# Altium PCB GeneralPurposePowerSupply.PcbDoc
Units mm, origin at the board's own origin, x right, y up, seen from the top; angles counter-clockwise.
Board outline 100 x 60 mm, 2 copper layers (Top Layer, Bottom Layer); 128 components, 67 nets, 380 pads, 795 vias.
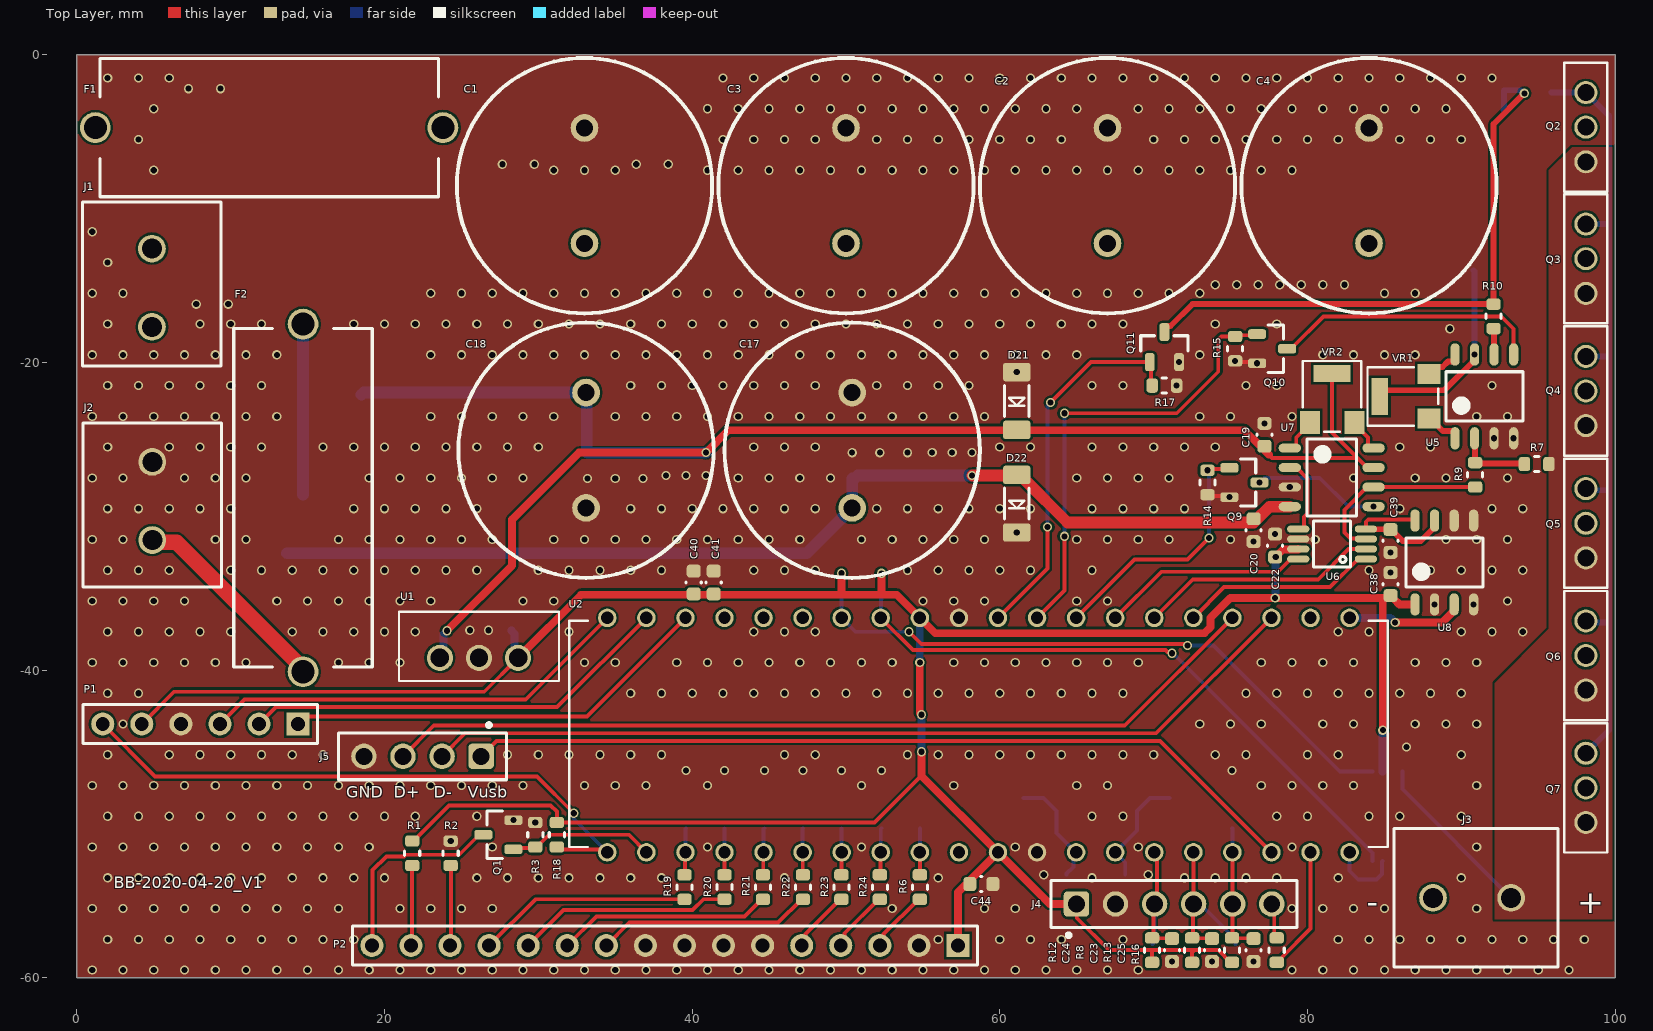
[diagram p0: Top Layer view]
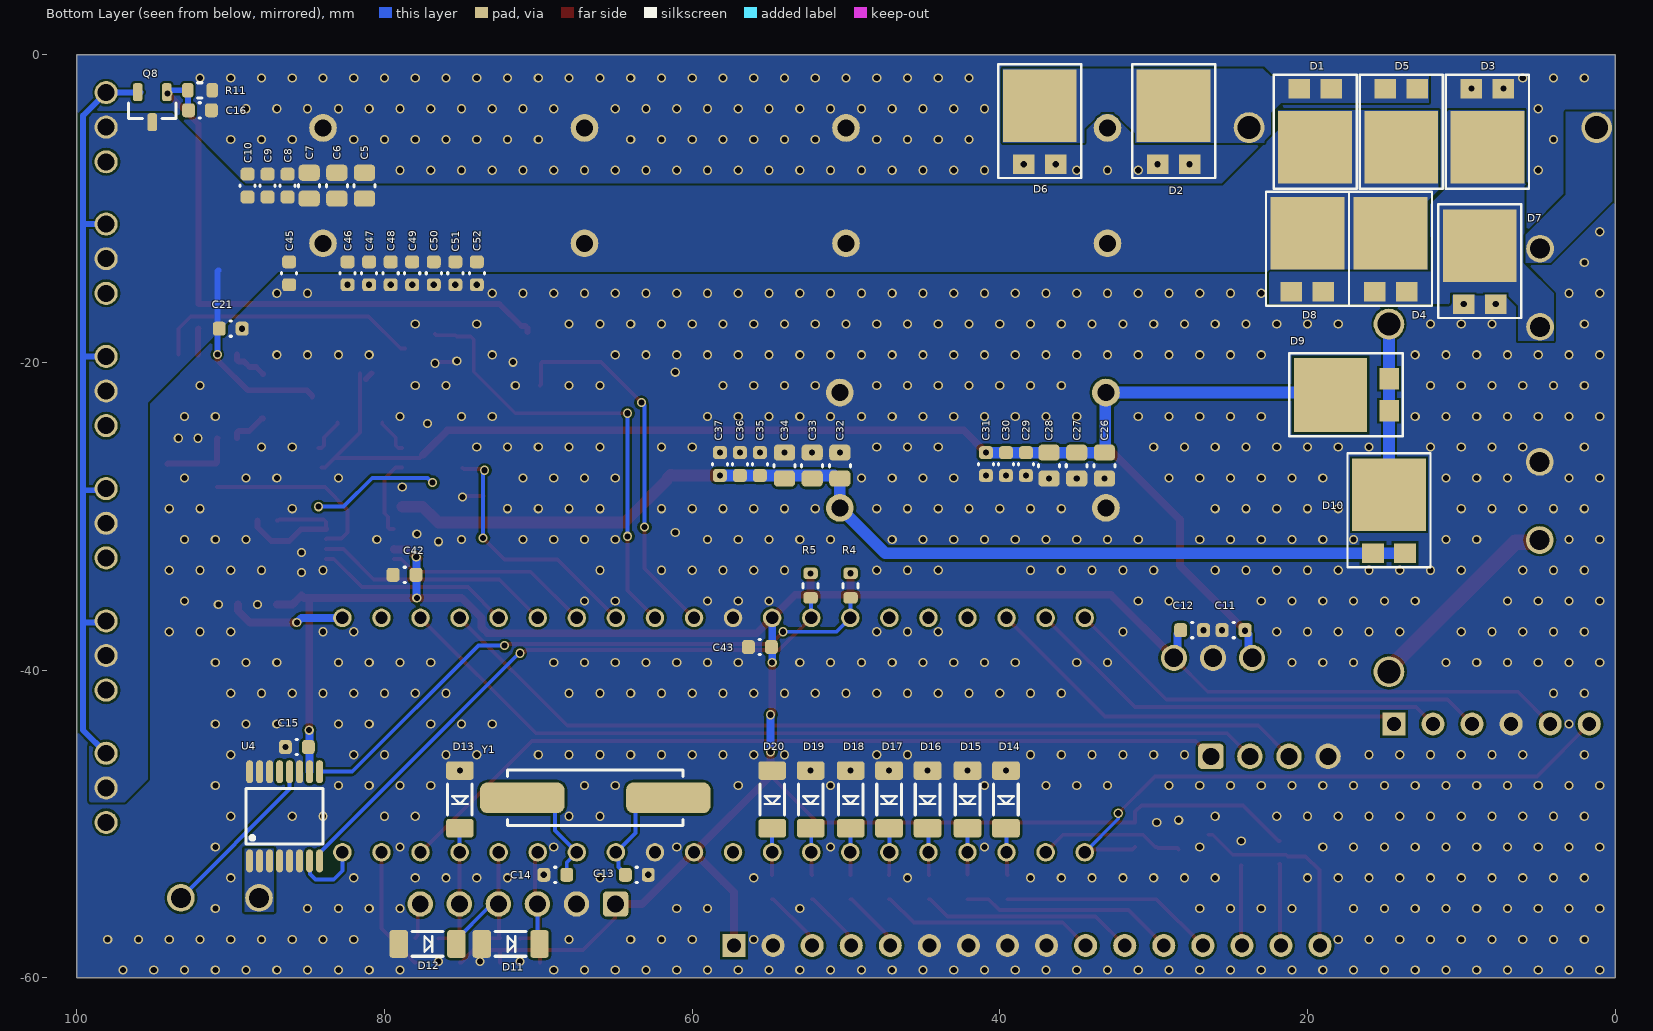
[diagram p1: Bottom Layer view, seen from below]
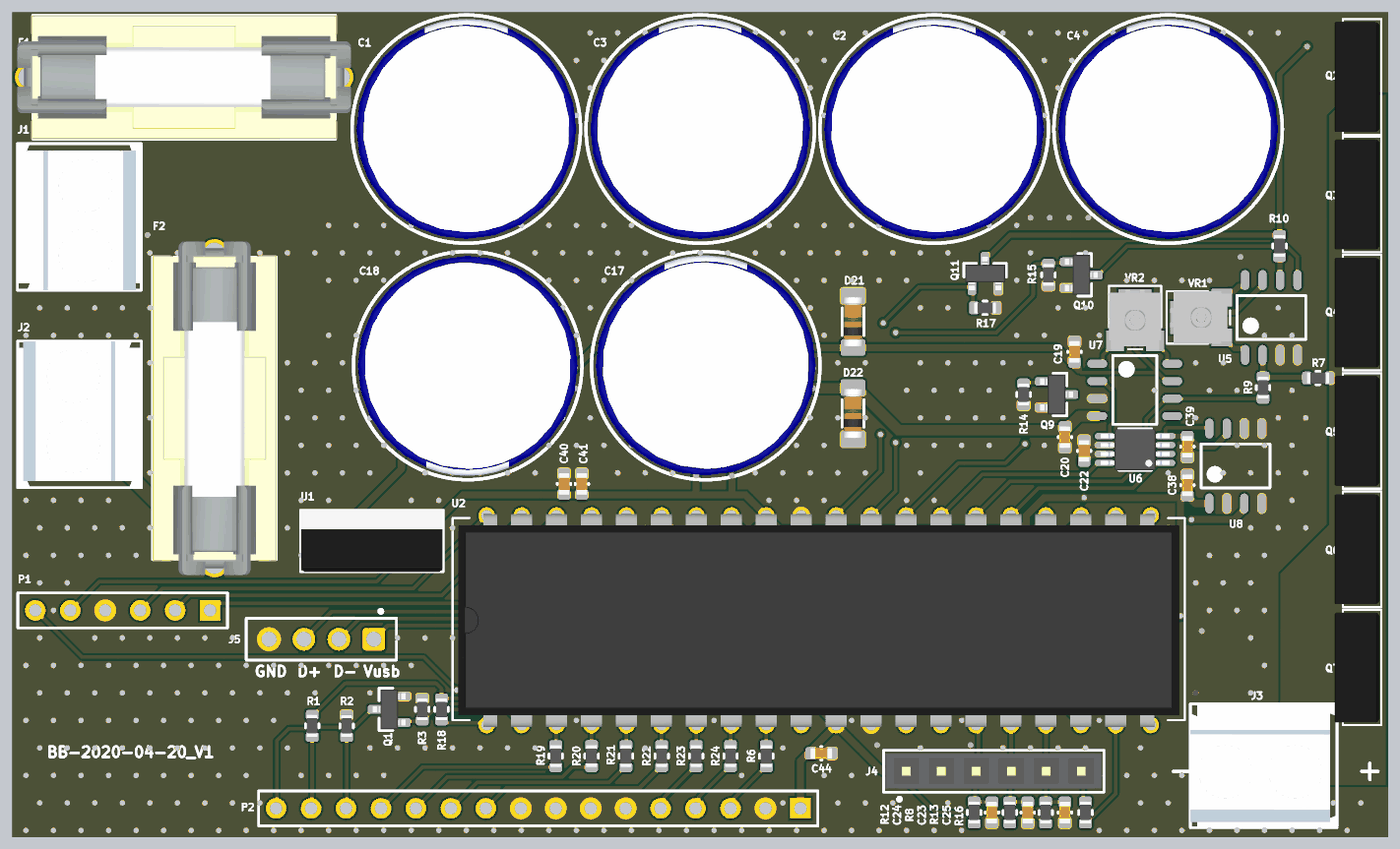
[diagram p2: 3D render of the assembled board from above, using the file's embedded part models]
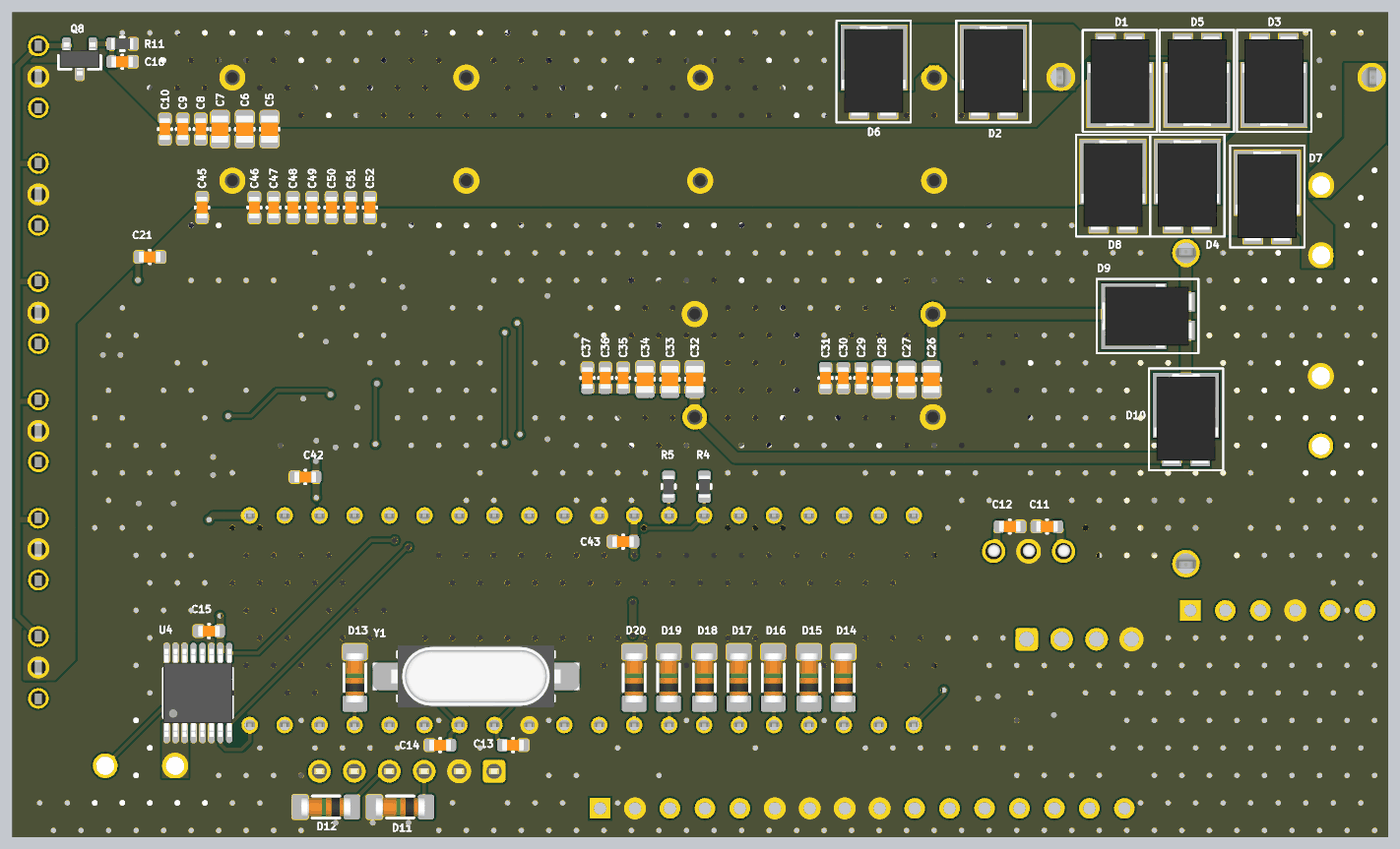
[diagram p3: 3D render of the assembled board from below, using the file's embedded part models]

## Layer stack, top to bottom
Top Solder: solder mask 0.0102, Solder Resist, Dk 3.5
Top Layer: signal copper 0.0356
Dielectric 1: dielectric 0.32, FR-4, Dk 4.8
Bottom Layer: signal copper 0.0356
Bottom Solder: solder mask 0.0102, Solder Resist, Dk 3.5

## Board outline
0,-60 0,0 100,0 100,-60

## Design rules (kind name [scope] priority, off if disabled: settings)
Clearance [All] p1: gap=0.15 ignorepadtopadclearanceinfootprint=FALSE except(0: Arc-Hole Track-Hole SMDPad-Hole THPad-Hole Via-Hole Fill-Hole Poly-Hole Region-Hole Text-Hole)
Height [All] p1: minheight=0 maxheight=35 prefheight=12.7
HoleSize [All] p1: absolutevalues=TRUE maxlimit=6.3 minlimit=0.2 maxpercent=80.000 minpercent=20.000
MinimumSolderMaskSliver [All] p1: minsoldermaskwidth=0.15
PlaneConnect [All] p1: planeconnectstyle=Direct reliefexpansion=0.508 reliefentries=4 reliefconductorwidth=0.254 reliefairgap=0.254
PolygonConnect [All] p1: connectstyle=Direct reliefconductorwidth=0.254 reliefentries=4 polygonreliefangle="90 Angle" airgapwidth=0.254
RoutingVias [All] p1: holewidth=0.6 width=0.35 viastyle="Through Hole" minholewidth=0.35 minwidth=0.3 maxholewidth=1.7 maxwidth=1.5
SilkToSilkClearance [All] p1: silktosilkclearance=0.15
SilkToSolderMaskClearance [IsPad] p1: minsilkscreentomaskgap=0.08 clearancetoexposedcopper=TRUE
SolderMaskExpansion [All] p1: expansion=0.045 istentingtop=FALSE
Width [All] p1: maxlimit=1.524 minlimit=0.203 preferedwidth=0.254 minimp=50.000000 maximp=50.000000 favimp=50.000000
24 further rules are at their usual default settings.

## Components (designator, comment, footprint, x,y, rotation, side; value= is the part's Value field where it differs from the comment)
C1 "2200u" C_16x32 33,-8.5 r90 top
C2 "2200u" C_16x32 67,-8.5 r90 top
C3 "2200u" C_16x32 50,-8.5 r90 top
C4 "2200u" C_16x32 84,-8.5 r90 top
C5 "10u" C0805_N 81.3,-8.5 r90 bottom
C6 "10u" C0805_N 83.1,-8.5 r90 bottom
C7 "10u" C0805_N 84.9,-8.5 r90 bottom
C8 "100n" C0603_N 86.3,-8.5 r90 bottom
C9 "100n" C0603_N 87.6,-8.5 r90 bottom
C10 "100n" C0603_N 88.9,-8.5 r90 bottom
C11 "100n" C0603_N 24.8,-37.4 r0 bottom
C12 "100n" C0603_N 27.5,-37.4 r180 bottom
C13 "20p" C0603_N 63.6,-53.3 r180 bottom
C14 "20p" C0603_N 68.9,-53.3 r0 bottom
C15 "100n" C0603_N 85.7,-45 r0 bottom
C16 "DNP" C0603_N 92,-3.6 r180 bottom
C17 "2200u" C_16x32 50.4,-25.7 r90 top
C18 "2200u" C_16x32 33.1,-25.7 r270 top
C19 "100n" C0603_N 77.2,-24.7 r90 top
C20 "100n" C0603_N 76.5,-30.9 r270 top
C21 "100n" C0603_N 90,-17.8 r180 bottom
C22 "100n" C0603_N 77.9,-31.9 r90 top
C23 "100n" C0603_N 73.8,-58.2 r270 top
C24 "100n" C0603_N 71.2,-58.2 r270 top
C25 "100n" C0603_N 76.5,-58.2 r270 top
C26 "10u" C0805_N 33.2,-26.7 r270 bottom
C27 "10u" C0805_N 35,-26.7 r270 bottom
C28 "10u" C0805_N 36.8,-26.7 r270 bottom
C29 "100n" C0603_N 38.3,-26.6 r270 bottom
C30 "100n" C0603_N 39.6,-26.6 r270 bottom
C31 "100n" C0603_N 40.9,-26.6 r270 bottom
C32 "10u" C0805_N 50.4,-26.7 r270 bottom
C33 "10u" C0805_N 52.2,-26.7 r270 bottom
C34 "10u" C0805_N 54,-26.7 r270 bottom
C35 "100n" C0603_N 55.6,-26.6 r270 bottom
C36 "100n" C0603_N 56.9,-26.6 r270 bottom
C37 "100n" C0603_N 58.2,-26.6 r270 bottom
C38 "1u" C0603_N 85.4,-34.4 r90 top
C39 "300p" C0603_N 85.4,-31.6 r270 top
C40 "100n" C0603_N 40.1,-34.3 r90 top
C41 "100n" C0603_N 41.4,-34.3 r90 top
C42 "100n" C0603_N 78.7,-33.8 r0 bottom
C43 "100n" C0603_N 55.6,-38.5 r0 bottom
C44 "100n" C0603_N 58.8,-53.9 r0 top
C45 "100n" C0603_N 86.2,-14.2 r270 bottom
C46 "100n" C0603_N 82.4,-14.2 r270 bottom
C47 "100n" C0603_N 81,-14.2 r270 bottom
C48 "100n" C0603_N 79.6,-14.2 r270 bottom
C49 "100n" C0603_N 78.2,-14.2 r270 bottom
C50 "100n" C0603_N 76.8,-14.2 r270 bottom
C51 "100n" C0603_N 75.4,-14.2 r270 bottom
C52 "100n" C0603_N 74,-14.2 r270 bottom
D1 "SS3P4L" TO-277 19.5,-2.195 r0 bottom
D2 "SS3P4L" TO-277 28.7,-7.105 r180 bottom
D3 "SS3P4L" TO-277 8.3,-2.195 r0 bottom
D4 "SS3P4L" TO-277 14.6,-15.405 r180 bottom
D5 "SS3P4L" TO-277 13.9,-2.195 r0 bottom
D6 "SS3P4L" TO-277 37.4,-7.105 r180 bottom
D7 "SS3P4L" TO-277 8.8,-16.205 r180 bottom
D8 "SS3P4L" TO-277 20,-15.405 r180 bottom
D9 "SS3P4L" TO-277 14.695,-22.1 r90 bottom
D10 "SS3P4L" TO-277 14.7,-32.405 r180 bottom
D11 "ZMM5,1" SOD-80 71.8,-57.8 r0 bottom
D12 "ZMM5,1" SOD-80 77.2,-57.8 r0 bottom
D13 "ZMM5,1" SOD-80 75.1,-48.4 r90 bottom
D14 "ZMM5,1" SOD-80 39.6,-48.4 r90 bottom
D15 "ZMM5,1" SOD-80 42.1,-48.4 r90 bottom
D16 "ZMM5,1" SOD-80 44.7,-48.4 r90 bottom
D17 "ZMM5,1" SOD-80 47.2,-48.4 r90 bottom
D18 "ZMM5,1" SOD-80 49.7,-48.4 r90 bottom
D19 "ZMM5,1" SOD-80 52.3,-48.4 r90 bottom
D20 "ZMM5,1" SOD-80 54.8,-48.4 r90 bottom
D21 "ZMM5,1" SOD-80 61.1,-22.5 r90 top
D22 "ZMM5,1" SOD-80 61.1,-29.175 r90 top
F1 "PTF/15" FUSE_PTF/15 12.497,-4.724 r0 top
F2 "PTF/15" FUSE_PTF/15 14.7,-28.8 r90 top
J1 "" TERM_BLOCK_2x1 4.877,-15.138 r270 top
J2 "" TERM_BLOCK_2x1 4.9,-29 r90 top
J3 "" TERM_BLOCK_2x1 90.7,-54.8 r180 top
J4 "" PINSOCK_6x1_THT 72.6,-55.2 r0 top
J5 "SOCHDR_4X1" PINSOCK_4x1_THT 18.66,-45.6 r180 top
P1 "Programmer" HDR1X6 14.38,-43.5 r180 top
P2 "Header 16" HDR1X16 57.28,-57.9 r180 top
Q1 "MOSFET_N" SOT23_123_N 27.4,-50.7 r90 top
Q2 "BD681" TO-126 98.1,-4.7 r90 top
Q3 "BD681" TO-126 98.1,-13.25 r90 top
Q4 "BD681" TO-126 98.1,-21.85 r90 top
Q5 "BD681" TO-126 98.1,-30.45 r90 top
Q6 "BD681" TO-126 98.1,-39.05 r90 top
Q7 "BD681" TO-126 98.1,-47.65 r90 top
Q8 "BC846B" SOT23_123_N 95.1,-3.4 r0 bottom
Q9 "2N7002" SOT23_123_N 75.9,-27.8 r270 top
Q10 "2N7002" SOT23_123_N 77.7,-19.1 r270 top
Q11 "2N7002" SOT23_123_N 70.7,-19 r0 top
R1 "RES" R0603_N 21.8,-51.9 r270 top
R2 "RES" R0603_N 24.3,-51.905 r90 top
R3 "RES" R0603_N 29.8,-50.7 r270 top
R4 "2k2" R0603_N 49.7,-34.5 r270 bottom
R5 "2k2" R0603_N 52.3,-34.5 r270 bottom
R6 "100" R0603_N 54.8,-54.1 r90 top
R7 "20k" R0603_N 94.9,-26.6 r180 top
R8 "2k2" R0603_N 72.5,-58.2 r90 top
R9 "1k" R0603_N 90.9,-27.3 r90 top
R10 "4k7" R0603_N 92.1,-17 r90 top
R11 "DNP" R0603_N 92,-2.3 r180 bottom
R12 "2k2" R0603_N 69.9,-58.2 r90 top
R13 "2k2" R0603_N 75.1,-58.2 r90 top
R14 "RES" R0603_N 73.5,-27.8 r270 top
R15 "RES" R0603_N 75.3,-19.1 r270 top
R16 "100" R0603_N 78,-58.2 r270 top
R17 "RES" R0603_N 70.7,-21.5 r180 top
R18 "1k" R0603_N 31.2,-50.7 r270 top
R19 "100" R0603_N 39.5,-54.1 r90 top
R20 "100" R0603_N 42.1,-54.095 r90 top
R21 "100" R0603_N 44.6,-54.1 r90 top
R22 "100" R0603_N 47.2,-54.1 r90 top
R23 "100" R0603_N 49.7,-54.1 r90 top
R24 "100" R0603_N 52.2,-54.1 r90 top
U1 "L78xx" TO-220 26.14,-39.2 r0 top
U2 "PIC18F4550" DIP-40 57.34,-51.84 r0 top
U4 "INA260" TSSOP-16 86.5,-49.5 r90 bottom
U5 "LT1218" SOIC-8 91.5,-22.2 r90 top
U6 "DAC8811" VSSOP-8 81.6,-31.8 r180 top
U7 "LT1218" SOIC-8 81.575,-27.465 r0 top
U8 "MCP1501" SOIC-8 88.9,-33 r90 top
VR1 "10k" POT_3364W 86.2,-22.2 r90 top
VR2 "10k" POT_3364W 81.6,-22.2 r0 top
Y1 "8MHz" CRYSTAL_HC49/SMD 66.3,-48.3 r180 bottom

## Footprints (in the part's own frame and the unit in brackets; to place one, negate y for a bottom-side part, rotate by r counter-clockwise, add the part's x,y. Pads: shape width x height; smd on the part's side, far side on the other; paste and mask are expansions set on the pad)
C0603_N [mm] "Capacitor, Chip; 1.60 mm L X 0.80 mm W X 0.87 mm H body"
  rrect50% 0.84x0.91 smd: 1(-0.745,0) 2(0.745,0)
  silkscreen extent -0.05,-0.49 0.05,0.49, body extent -0.8,-0.4 0.8,0.4, height 0.87
C0805_N [mm] "Capacitor, Chip; 2.00 mm L X 1.25 mm W X 1.35 mm H body"
  rrect48% 1.05x1.38 smd: 1(-0.84,0) 2(0.84,0)
  silkscreen extent -0.08,-0.68 0.08,0.68, body extent -1,-0.63 1,0.63, height 1.35
C_16x32 [mm] "Capacitor, Aluminum Electrolytic; 7,5mm pitch"
  round 1.8 hole 1.1: N(3.75,0) P(-3.75,0)
  silkscreen extent -8.3,-8.3 8.3,8.3, body extent -8,-8 8.01,8, height 32.01
CRYSTAL_HC49/SMD [mm] "HC49/SMD"
  rrect48% 5.5x2 smd: 1(-4.75,0) 2(4.75,0)
  silkscreen extent -5.7,-1.8 5.7,1.8, body extent -7.5,-2.25 7.5,2.25, height 5.1
DIP-40 [mm] "DIP-40"
  round 1.2 hole 0.8: 1(-22.86,0) 2(-20.32,0) 3(-17.78,0) 4(-15.24,0) 5(-12.7,0) 6(-10.16,0) 7(-7.62,0) 8(-5.08,0) 9(-2.54,0) 10(0,0) 11(2.54,0) 12(5.08,0) 13(7.62,0) 14(10.16,0) 15(12.7,0) 16(15.24,0) 17(17.78,0) 18(20.32,0) 19(22.86,0) 20(25.4,0) 21(25.4,15.24) 22(22.86,15.24) 23(20.32,15.24) 24(17.78,15.24) 25(15.24,15.24) 26(12.7,15.24) 27(10.16,15.24) 28(7.62,15.24) 29(5.08,15.24) 30(2.54,15.24) 31(0,15.24) 32(-2.54,15.24) 33(-5.08,15.24) 34(-7.62,15.24) 35(-10.16,15.24) 36(-12.7,15.24) 37(-15.24,15.24) 38(-17.78,15.24) 39(-20.32,15.24) 40(-22.86,15.24)
  silkscreen extent -25.33,0.35 27.87,15.05, body extent -24.93,-0.12 27.47,15.37, height 5
FUSE_PTF/15 [mm] "Fuse holder, PTF/15"
  round 2 hole 1.5: 1(-11.3,0) 2(11.3,0)
  silkscreen extent -11,-4.5 11,4.5, body extent -12.13,-4.51 12.12,4.49, height 13.97
HDR1X6 [mm] "Connector; Header; 6 Position"
  rect 1.5x1.5 hole 0.9: 1(0,0)
  round 1.5 hole 0.9: 2(2.54,0) 3(5.08,0) 4(7.62,0) 5(10.16,0) 6(12.7,0)
  silkscreen extent -1.27,-1.27 13.97,1.27
HDR1X16 [mm] "Connector; Header; 16 Position"
  rect 1.5x1.5 hole 0.9: 1(0,0)
  round 1.5 hole 0.9: 2(2.54,0) 3(5.08,0) 4(7.62,0) 5(10.16,0) 6(12.7,0) 7(15.24,0) 8(17.78,0) 9(20.32,0) 10(22.86,0) 11(25.4,0) 12(27.94,0) 13(30.48,0) 14(33.02,0) 15(35.56,0) 16(38.1,0)
  silkscreen extent -1.27,-1.27 39.37,1.27
PINSOCK_4x1_THT [mm] "THT Vertical Pin Header, Pitch 2.54mm, 4 pins"
  rrect30% 1.65x1.65 / inner round 1.65 / far side rrect30% 1.65x1.65 hole 1.1 paste-1.65: 1(-7.62,0)
  round 1.65 hole 1.1 paste-1.65: 2(-5.08,0) 3(-2.54,0) 4(0,0)
  silkscreen extent -9.27,-2.16 1.65,1.52
PINSOCK_6x1_THT [mm] "THT Vertical Pin Header, Pitch 2.54mm, Dual Row, 6 pins"
  rrect30% 1.65x1.65 / inner round 1.65 / far side rrect30% 1.65x1.65 hole 1.1 paste-1.65: 1(-7.62,0)
  round 1.65 hole 1.1 paste-1.65: 2(-5.08,0) 3(-2.54,0) 4(0,0) 5(2.54,0) 6(5.08,0)
  silkscreen extent -9.27,-2.16 6.73,1.52, body extent -9.14,-1.27 6.6,1.27, height 8.5
POT_3364W [mm] "3364W potentiometer"
  rect 1.3x1.5 smd: 1(1.45,-1.7) 3(-1.45,-1.7)
  rect 2.4x1.1 smd: 2(0,1.5)
  silkscreen extent -1.9,-2.3 1.9,2.3, body extent -1.9,-2.43 1.9,2.07, height 1.01
R0603_N [mm] "Resistor, Chip; 1.60 mm L X 0.80 mm W X 0.55 mm H body"
  rrect51% 0.74x0.93 smd: 1(-0.795,0) 2(0.795,0)
  silkscreen extent -0.15,-0.49 0.15,0.49, body extent -0.8,-0.4 0.8,0.4, height 0.55
SOD-80 [mm] "SOD-80"
  rrect30% 1.2x1.8 smd: A(1.875,0) C(-1.875,0)
  silkscreen extent -1,-0.8 1,0.8, body extent -1.8,-0.75 1.8,0.75, height 1.5
SOIC-8 [mm] "SOIC, 8-Leads, Body 4.90x3.90mm, Pitch 1.27mm, IPC Medium Density"
  oval 1.45x0.6 smd: 1(-2.725,1.905) 2(-2.725,0.635) 3(-2.725,-0.635) 4(-2.725,-1.905) 5(2.725,-1.905) 6(2.725,-0.635) 7(2.725,0.635) 8(2.725,1.905)
  silkscreen extent -1.6,-2.5 1.6,2.5, body extent -2,-2.5 2,2.5, height 1.75
SOT23_123_N [mm] "Small Outline Transistor (SOT23), 0.95 mm pitch; 3 pin, 2.90 mm L X 1.30 mm W X 1.10 mm H body"
  rrect51% 0.63x1.17 smd: 1(-0.95,-0.975) 2(0.95,-0.975) 3(0,0.975)
  silkscreen extent -1.54,-0.25 1.54,0.74, body extent -1.45,-1.2 1.45,1.2, height 1.1
TERM_BLOCK_2x1 [mm] "TERMINAL BLOCK, TE CONNECTIVITY 282841-2"
  round 1.8 hole 1.3: 1(2.54,0) 2(-2.54,0)
  silkscreen extent -5.58,-4.5 5.08,4.5, body extent -5.58,-4.5 5.08,4.5, height 15.2
TO-126 [mm] "TO-126"
  round 1.5 hole 1.1: B(2.25,0) C(0,0) E(-2.25,0)
  silkscreen extent -4.2,-1.4 4.2,1.4, body extent -4,-1.25 4,2, height 24.94
TO-220 [mm] "TO-220"
  round 1.7 hole 1.2: 1(-2.54,0) 2(0,0) 3(2.54,0)
  silkscreen extent -5.2,-1.5 5.2,3, body extent -5.15,-1.5 5.15,3, height 15.8
TO-277 [mm] "TO-277"
  rect 1.4x1.27 smd: A(-1.04,0) A(1.04,0)
  rect 4.8x4.72 smd: C(0,3.805)
  silkscreen extent -2.7,-0.9 2.7,6.5, body extent -2.3,-0.41 2.3,6.09, height 1.05
TSSOP-16 [mm] "TSSOP-16"
  oval 1.5x0.45 smd mask+0.025: 1(-2.9,2.275) 2(-2.9,1.625) 3(-2.9,0.975) 4(-2.9,0.325) 5(-2.9,-0.325) 6(-2.9,-0.975) 7(-2.9,-1.625) 8(-2.9,-2.275) 9(2.9,-2.275) 10(2.9,-1.625) 11(2.9,-0.975) 12(2.9,-0.325) 13(2.9,0.325) 14(2.9,0.975) 15(2.9,1.625) 16(2.9,2.275)
  silkscreen extent -1.8,-2.5 1.8,2.5, body extent -3.2,-2.5 3.2,2.5, height 1.1
VSSOP-8 [mm] "VSSOP-8"
  oval 1.45x0.45 smd mask+0.025: 1(-2.2,0.975) 2(-2.2,0.325) 3(-2.2,-0.325) 4(-2.2,-0.975) 5(2.2,-0.975) 6(2.2,-0.325) 7(2.2,0.325) 8(2.2,0.975)
  silkscreen extent -1.2,-1.5 1.2,1.5, body extent -2.5,-1.5 2.5,1.5, height 1.1

## Part data
C1 C2 C3 C4 C17 C18: library part CAP_POL, RevS="$Rev:: 58        $"
C5 C6 C7 C8 C9 C10 C11 C12 C13 C14 C15 C16 C19 C20 C21 C22 C23 C24 C25 C26 C27 C28 C29 C30 C31 C32 C33 C34 C35 C36 C37 C38 C39 C40 C41 C42 C43 C44 C45 C46 C47 C48 C49 C50 C51 C52: library part CAP, RevS="$Rev:: 58        $"
D1 D2 D3 D4 D5 D6 D7 D8 D9 D10: library part DIODE
D11 D12 D13 D14 D15 D16 D17 D18 D19 D20 D21 D22: library part DIODE_ZENER
F1 F2: library part FUSE
J1 J2 J3: library part SOCHDR_2X1, "Socket", ComponentLink1Description=Manufacturer, ComponentLink1URL=http://www.we-online.de, ComponentLink2Description=Datasheet, ComponentLink2URL=http://katalog.we-online.de/em/datasheet/691412320002.pdf
J4: library part SOCHDR_6X1, "Socket", ComponentLink1Description=Manufacturer, ComponentLink1URL=http://www.we-online.de, ComponentLink2Description=Datasheet, ComponentLink2URL=http://katalog.we-online.de/em/datasheet/691412320002.pdf
J5: "Socket", ComponentLink1Description=Manufacturer, ComponentLink1URL=http://www.we-online.de, ComponentLink2Description=Datasheet, ComponentLink2URL=http://katalog.we-online.de/em/datasheet/691412320002.pdf
P1: library part "Header 6", "Header, 6-Pin", LatestRevisionDate=17-Jul-2002, LatestRevisionNote="Re-released for DXP Platform.", Publisher="Altium Limited"
P2: "Header, 16-Pin", LatestRevisionDate=17-Jul-2002, LatestRevisionNote="Re-released for DXP Platform.", Publisher="Altium Limited"
Q2 Q3 Q4 Q5 Q6 Q7 Q8: library part BJT_NPN
Q9 Q10 Q11: library part MOSFET_N
R4 R5 R6 R7 R8 R9 R10 R11 R12 R13 R16 R18 R19 R20 R21 R22 R23 R24: library part RES
U2: library part PIC18F4550_DIP40, "PIC18F4550 40 pin type"
U6: "16 bit, 3-wire SPI DAC"
U8: "SOIC-8 Volatage reference"
VR1 VR2: library part RES_POT_M, "Mono"
Y1: library part XTAL_12

## Via types
v1: diameter 0.6, hole 0.4, Top Layer to Bottom Layer, tented both sides, 795 vias

## Nets (pads, with @x,y where several pads share a name; then routed paths per layer and width w, separated by ;. In a path a pad name is that pad's centre, name@x,y a point inside that pad or via, vN(x,y) a via of type N, cw(c..) or ccw(c..) an arc to the next point about the centre after c; other vN are vias at no path point)
5V: C12.1 C15.1 C22.1 C38.1 C40.1 C41.1 C42.1 C43.1 C44.1 J4.1 P1.5 P2.1 R1.1 R4.1 R5.1 R8.1 R12.1 R13.1 R18.1 U1.3 U2.11 U2.32 U4.10 U6.7 U8.1 | length 190.5
  Top Layer w0.254: P1.5 6.32,-41.4 26.48,-41.4 U1.3 ; R1.1 21.895,-51.105 24.2,-48.8 30.8,-48.8 31.2,-49.2 R18.1 51.855,-49.905 54.9,-46.86 ; J4.1 65,-55.22 65,-56.1 67.1,-58.2 69.874,-58.2 ; R12.1 69.9,-58.226 69.874,-58.2 ; R8.1 72.5,-58.349 72.649,-58.2 ; R13.1 75.005,-58.995 74.21,-58.2 72.649,-58.2 ; 69.874,-58.2 72.649,-58.2
  Top Layer w0.508: U1.3 32.78,-35.1 40.1,-35.1 41.4,-35.1 49.7,-35.1 ; v1(49.7,-33.7) 49.7,-35.1 ; v1(52.3,-33.705) 52.3,-35.1 ; v1(54.8,-39.5) 54.8,-42.8 v1(54.9,-42.9) ; v1(54.9,-45.3) 54.9,-46.86 U2.11 ; P2.1 57.28,-54.44 57.955,-53.765 U2.11 ; J4.1 63.24,-55.2 U2.11 ; C22.1@77.8,-32.745 C22.1 v1(77.935,-32.645) 78.434,-32.146 79.379,-32.146 U6.7 ; v1(84.9,-43.9) 84.9,-35.3 ; C38.1 85.245,-35.3 84.9,-35.3 ; C38.1@85.601,-35.346 85.98,-35.725 U8.1 ; 49.7,-35.1 52.3,-35.1 ; 52.3,-35.1 53.3,-35.1 U2.32 55.804,-37.604 73.296,-37.604 73.7,-37.2 73.7,-36.6 75,-35.3 v1(77.9,-35.3) 84.9,-35.3
  Bottom Layer w0.254: U1.3 U1.3@28.8,-39.32
  Bottom Layer w0.508: C12.1 28.245,-37.435 28.452,-37.642 28.452,-38.972 U1.3 ; v1(54.8,-39.5) 54.8,-38.5 54.8,-36.8 54.9,-36.7 U2.32 ; v1(54.9,-45.3) v1(54.9,-42.9) ; v1(77.9,-35.3) 77.917,-35.283 77.917,-32.663 v1(77.935,-32.645) ; U4.10 84.875,-43.925 v1(84.9,-43.9)
BTN: C25.1 D13.C J4.5 R13.2 U2.17 | length 8.6
  Top Layer w0.254: U2.17 75.13,-51.85 75.13,-55.19 J4.5 75.12,-55.22 75.12,-57.385 R13.2 75.125,-57.43 76.475,-57.43 C25.1
  Bottom Layer w0.254: D13.C 75.12,-50.295 U2.17
DAC_C\S\: U2.27 U6.8 | length 13.5
  Top Layer w0.254: U2.27 70.5,-33.6 78.089,-33.6 78.914,-32.775 U6.8
DAC_MOSI: U2.26 U6.2 | length 15.6
  Top Layer w0.254: U2.26 72.54,-34.1 80.7,-34.1 82.675,-32.125 U6.2
DAC_SCK: U2.25 U6.1 | length 12.8
  Top Layer w0.254: U2.25 74.58,-34.6 81.475,-34.6 83.3,-32.775 U6.1
ENC1: C24.1 D11.C J4.3 R12.2 U2.15 | length 9.8
  Top Layer w0.254: U2.15 70.221,-52.021 70.221,-52.461 70.222,-52.462 70.222,-55.038 69.98,-55.28 69.98,-57.325 R12.2 69.925,-57.43 71.175,-57.43 C24.1
  Bottom Layer w0.254: D11.C 70.06,-57.665 J4.3
ENC2: C23.1 D12.C J4.4 R8.2 U2.16 | length 10.9
  Top Layer w0.254: U2.16 72.59,-51.85 72.59,-55.19 J4.4 72.55,-55.25 72.55,-57.355 R8.2 72.525,-57.43 73.775,-57.43 C23.1
  Bottom Layer w0.254: J4.4 72.867,-55.467 73.292,-55.467 75.325,-57.5 D12.C
GND: C1.N C2.N C3.N C4.N C5.2 C6.2 C7.2 C8.2 C9.2 C10.2 C11.2 C12.2 C13.2 C14.2 C15.2 C16.2 C17.N C18.N C19.2 C20.2 C21.2 C22.2 C23.2 C24.2 C25.2 C26.2 C27.2 C28.2 C29.2 C30.2 C31.2 C32.1 C33.1 C34.1 C35.1 C36.1 C37.1 C38.2 C39.2 C40.2 C41.2 C42.2 C43.2 C44.2 C45.2 C46.2 C47.2 C48.2 C49.2 C50.2 C51.2 C52.2 D2.A D3.A D6.A D7.A D11.A D12.A D13.A D14.A D15.A D16.A D17.A D18.A D19.A D20.A D21.A D22.C J2.1 J4.2 J5.4 P1.4 P2.2 P2.6 P2.7 P2.8 P2.9 Q1.2 Q9.2 Q10.2 Q11.2 R2.2 R3.1 R11.2 R14.2 R15.2 R17.1 U1.2 U2.12 U2.31 U4.4 U4.5 U4.6 U4.11 U4.14 U4.15 U4.16 U5.3 U5.4 U6.6 U7.3 U8.2 U8.4 U8.5 U8.6 | length 2.9
  Top Layer w0.254: R14.2@73.578,-28.672 74.848,-28.672 v1(74.925,-28.75) ; v1(75.3,-19.895) 75.378,-19.973 76.648,-19.973 v1(76.725,-20.05)
  other v1: 1,-59.5 3,-59.5 5,-59.5 7,-59.5 9,-59.5 11,-59.5 13,-59.5 15,-59.5 17,-59.5 19,-59.5 21,-59.5 23,-59.5 25,-59.5 27,-59.5 29,-59.5 31,-59.5 33,-59.5 35,-59.5 37,-59.5 39,-59.5 41,-59.5 43,-59.5 45,-59.5 47,-59.5 49,-59.5 51,-59.5 53,-59.5 55,-59.5 57,-59.5 59,-59.5 61,-59.5 63,-59.5 65,-59.5 67,-59.5 69,-59.5 79,-59.5 81,-59.5 83,-59.5 85,-59.5 87,-59.5 89,-59.5 91,-59.5 93,-59.5 95,-59.5 97,-59.5 71.2,-58.945 73.8,-58.945 76.5,-58.945 2,-57.5 4,-57.5 6,-57.5 8,-57.5 10,-57.5 12,-57.5 14,-57.5 16,-57.5 18,-57.5 56,-57.5 60,-57.5 62,-57.5 64,-57.5 68,-57.5 82,-57.5 84,-57.5 86,-57.5 88,-57.5 90,-57.5 92,-57.5 94,-57.5 96,-57.5 98,-57.5 1,-55.5 3,-55.5 5,-55.5 7,-55.5 9,-55.5 11,-55.5 13,-55.5 15,-55.5 17,-55.5 21,-55.5 23,-55.5 25,-55.5 27,-55.5 53,-55.5 59,-55.5 61,-55.5 79,-55.5 81,-55.5 83,-55.5 85,-55.5 91,-55.5 2,-53.5 4,-53.5 6,-53.5 8,-53.5 10,-53.5 12,-53.5 14,-53.5 16,-53.5 18,-53.5 20,-53.5 26,-53.5 28,-53.5 30,-53.5 32,-53.5 34,-53.5 36,-53.5 38,-53.5 46,-53.5 56,-53.5 66,-53.5 72,-53.5 74,-53.5 76,-53.5 78,-53.5 82,-53.5 90,-53.5 62.855,-53.3 69.645,-53.3 1,-51.5 3,-51.5 5,-51.5 7,-51.5 9,-51.5 11,-51.5 13,-51.5 15,-51.5 17,-51.5 19,-51.5 27,-51.5 41,-51.5 51,-51.5 61,-51.5 69,-51.5 79,-51.5 91,-51.5 24.3,-51.11 29.8,-49.905 28.375,-49.75 2,-49.5 4,-49.5 6,-49.5 8,-49.5 10,-49.5 12,-49.5 14,-49.5 16,-49.5 18,-49.5 20,-49.5 22,-49.5 26,-49.5 66,-49.5 68,-49.5 78,-49.5 80,-49.5 84,-49.5 86,-49.5 90,-49.5 1,-47.5 3,-47.5 5,-47.5 7,-47.5 9,-47.5 11,-47.5 13,-47.5 15,-47.5 17,-47.5 19,-47.5 21,-47.5 23,-47.5 25,-47.5 27,-47.5 29,-47.5 33,-47.5 35,-47.5 37,-47.5 41,-47.5 51,-47.5 57,-47.5 65,-47.5 67,-47.5 77,-47.5 79,-47.5 81,-47.5 83,-47.5 91,-47.5 39.6,-46.525 42.1,-46.525 44.7,-46.525 47.2,-46.525 49.7,-46.525 52.3,-46.525 75.1,-46.525 2,-45.5 6,-45.5 8,-45.5 10,-45.5 12,-45.5 14,-45.5 16,-45.5 28,-45.5 30,-45.5 32,-45.5 34,-45.5 36,-45.5 38,-45.5 46,-45.5 48,-45.5 54,-45.5 56,-45.5 58,-45.5 60,-45.5 62,-45.5 64,-45.5 66,-45.5 68,-45.5 70,-45.5 74,-45.5 76,-45.5 80,-45.5 82,-45.5 90,-45.5 86.445,-45 3,-43.5 73,-43.5 75,-43.5 77,-43.5 81,-43.5 83,-43.5 87,-43.5 89,-43.5 91,-43.5 2,-41.5 4,-41.5 36,-41.5 38,-41.5 40,-41.5 42,-41.5 44,-41.5 46,-41.5 48,-41.5 50,-41.5 52,-41.5 54,-41.5 56,-41.5 58,-41.5 60,-41.5 62,-41.5 64,-41.5 66,-41.5 68,-41.5 76,-41.5 78,-41.5 80,-41.5 82,-41.5 84,-41.5 86,-41.5 88,-41.5 90,-41.5 1,-39.5 3,-39.5 5,-39.5 7,-39.5 9,-39.5 11,-39.5 17,-39.5 19,-39.5 21,-39.5 33,-39.5 35,-39.5 39,-39.5 41,-39.5 43,-39.5 45,-39.5 47,-39.5 49,-39.5 51,-39.5 53,-39.5 57,-39.5 59,-39.5 61,-39.5 63,-39.5 65,-39.5 67,-39.5 69,-39.5 77,-39.5 79,-39.5 81,-39.5 83,-39.5 87,-39.5 89,-39.5 91,-39.5 2,-37.5 4,-37.5 6,-37.5 8,-37.5 10,-37.5 14,-37.5 16,-37.5 18,-37.5 20,-37.5 22,-37.5 32,-37.5 44,-37.5 46,-37.5 48,-37.5 82,-37.5 84,-37.5 90,-37.5 92,-37.5 94,-37.5 25.545,-37.4 26.755,-37.4 88.265,-35.725 90.805,-35.725 1,-35.5 3,-35.5 5,-35.5 7,-35.5 13,-35.5 15,-35.5 17,-35.5 19,-35.5 21,-35.5 23,-35.5 29,-35.5 31,-35.5 55,-35.5 57,-35.5 59,-35.5 65,-35.5 67,-35.5 93,-35.5 85.4,-33.655 2,-33.5 4,-33.5 6,-33.5 10,-33.5 12,-33.5 14,-33.5 16,-33.5 18,-33.5 20,-33.5 22,-33.5 24,-33.5 26,-33.5 30,-33.5 32,-33.5 34,-33.5 36,-33.5 38,-33.5 44,-33.5 46,-33.5 48,-33.5 54,-33.5 56,-33.5 58,-33.5 60,-33.5 62,-33.5 66,-33.5 84,-33.5 88,-33.5 90,-33.5 92,-33.5 94,-33.5 85.4,-32.345 76.5,-31.645 1,-31.5 3,-31.5 9,-31.5 11,-31.5 17,-31.5 19,-31.5 21,-31.5 23,-31.5 25,-31.5 27,-31.5 31,-31.5 33,-31.5 35,-31.5 37,-31.5 39,-31.5 41,-31.5 43,-31.5 45,-31.5 47,-31.5 51,-31.5 53,-31.5 55,-31.5 57,-31.5 59,-31.5 65,-31.5 67,-31.5 69,-31.5 71,-31.5 75,-31.5 80.5,-31.5 89,-31.5 91,-31.5 93,-31.5 77.9,-31.155 61.1,-31.05 2,-29.5 4,-29.5 6,-29.5 8,-29.5 10,-29.5 18,-29.5 20,-29.5 22,-29.5 24,-29.5 26,-29.5 36,-29.5 38,-29.5 40,-29.5 42,-29.5 44,-29.5 46,-29.5 48,-29.5 52,-29.5 54,-29.5 56,-29.5 58,-29.5 60,-29.5 62,-29.5 66,-29.5 68,-29.5 70,-29.5 72,-29.5 86,-29.5 92,-29.5 94,-29.5 78.85,-28.1 33.2,-27.54 35,-27.54 36.8,-27.54 1,-27.5 3,-27.5 7,-27.5 9,-27.5 11,-27.5 19,-27.5 21,-27.5 23,-27.5 25,-27.5 27,-27.5 29,-27.5 43,-27.5 45,-27.5 47,-27.5 49,-27.5 65,-27.5 67,-27.5 69,-27.5 71,-27.5 83,-27.5 87,-27.5 89,-27.5 93,-27.5 38.3,-27.345 39.6,-27.345 40.9,-27.345 50.4,-25.86 52.2,-25.86 54,-25.86 55.6,-25.855 56.9,-25.855 58.2,-25.855 2,-25.5 6,-25.5 8,-25.5 10,-25.5 12,-25.5 16,-25.5 18,-25.5 20,-25.5 22,-25.5 24,-25.5 26,-25.5 28,-25.5 30,-25.5 44,-25.5 46,-25.5 48,-25.5 60,-25.5 62,-25.5 66,-25.5 68,-25.5 70,-25.5 72,-25.5 74,-25.5 86,-25.5 88,-25.5 92.135,-24.925 93.405,-24.925 77.2,-23.955 1,-23.5 3,-23.5 5,-23.5 7,-23.5 9,-23.5 11,-23.5 13,-23.5 23,-23.5 25,-23.5 27,-23.5 29,-23.5 31,-23.5 35,-23.5 37,-23.5 39,-23.5 41,-23.5 43,-23.5 45,-23.5 47,-23.5 49,-23.5 51,-23.5 53,-23.5 55,-23.5 57,-23.5 59,-23.5 73,-23.5 75,-23.5 79,-23.5 91,-23.5 93,-23.5 2,-21.5 4,-21.5 6,-21.5 8,-21.5 10,-21.5 12,-21.5 36,-21.5 38,-21.5 40,-21.5 42,-21.5 44,-21.5 46,-21.5 48,-21.5 52,-21.5 54,-21.5 56,-21.5 58,-21.5 66,-21.5 68,-21.5 71.495,-21.5 76,-21.5 78,-21.5 92,-21.5 61.1,-20.625 71.65,-19.975 1,-19.5 3,-19.5 5,-19.5 7,-19.5 9,-19.5 11,-19.5 13,-19.5 23,-19.5 25,-19.5 27,-19.5 29,-19.5 31,-19.5 33,-19.5 35,-19.5 37,-19.5 39,-19.5 41,-19.5 43,-19.5 45,-19.5 47,-19.5 49,-19.5 51,-19.5 53,-19.5 55,-19.5 57,-19.5 59,-19.5 61,-19.5 63,-19.5 65,-19.5 73,-19.5 81,-19.5 83,-19.5 85,-19.5 87,-19.5 89.255,-17.8 2,-17.5 8,-17.5 10,-17.5 12,-17.5 18,-17.5 20,-17.5 22,-17.5 24,-17.5 26,-17.5 28,-17.5 30,-17.5 32,-17.5 34,-17.5 36,-17.5 38,-17.5 40,-17.5 42,-17.5 44,-17.5 46,-17.5 48,-17.5 50,-17.5 52,-17.5 54,-17.5 56,-17.5 58,-17.5 60,-17.5 62,-17.5 64,-17.5 66,-17.5 68,-17.5 74,-17.5 78,-17.5 7.76,-16.205 9.84,-16.205 1,-15.5 3,-15.5 23,-15.5 25,-15.5 27,-15.5 29,-15.5 31,-15.5 33,-15.5 35,-15.5 37,-15.5 39,-15.5 41,-15.5 43,-15.5 45,-15.5 47,-15.5 49,-15.5 51,-15.5 53,-15.5 55,-15.5 57,-15.5 59,-15.5 61,-15.5 63,-15.5 65,-15.5 67,-15.5 69,-15.5 71,-15.5 73,-15.5 85,-15.5 87,-15.5 74,-14.945 75.4,-14.945 76.8,-14.945 78.2,-14.945 79.6,-14.945 81,-14.945 82.4,-14.945 2,-13.5 1,-11.5 5,-7.5 31,-7.5 33,-7.5 35,-7.5 41,-7.5 43,-7.5 45,-7.5 47,-7.5 49,-7.5 51,-7.5 53,-7.5 55,-7.5 57,-7.5 59,-7.5 61,-7.5 63,-7.5 65,-7.5 67,-7.5 69,-7.5 71,-7.5 73,-7.5 75,-7.5 77,-7.5 79,-7.5 27.66,-7.105 29.74,-7.105 36.36,-7.105 38.44,-7.105 4,-5.5 42,-5.5 44,-5.5 46,-5.5 48,-5.5 52,-5.5 54,-5.5 56,-5.5 58,-5.5 60,-5.5 62,-5.5 64,-5.5 70,-5.5 72,-5.5 74,-5.5 76,-5.5 78,-5.5 80,-5.5 82,-5.5 86,-5.5 88,-5.5 90,-5.5 5,-3.5 41,-3.5 43,-3.5 45,-3.5 47,-3.5 49,-3.5 51,-3.5 53,-3.5 55,-3.5 57,-3.5 59,-3.5 61,-3.5 63,-3.5 65,-3.5 69,-3.5 71,-3.5 73,-3.5 75,-3.5 77,-3.5 79,-3.5 81,-3.5 83,-3.5 85,-3.5 87,-3.5 89,-3.5 7.26,-2.195 9.34,-2.195 2,-1.5 4,-1.5 6,-1.5 42,-1.5 44,-1.5 46,-1.5 48,-1.5 50,-1.5 52,-1.5 54,-1.5 56,-1.5 58,-1.5 60,-1.5 62,-1.5 64,-1.5 66,-1.5 68,-1.5 70,-1.5 72,-1.5 74,-1.5 76,-1.5 78,-1.5 80,-1.5 82,-1.5 84,-1.5 86,-1.5 88,-1.5 90,-1.5 92,-1.5
INA260_ALERT: U2.20 U4.7 | length 4.5
  Bottom Layer w0.254: U2.20 82.74,-53.04 83.3,-53.6 84.5,-53.6 84.837,-53.263 84.837,-52.438 U4.7
INA260_SCL: R4.2 U2.34 U4.9 | length 39.9
  Top Layer w0.254: v1(54.096,-37.5) 54.892,-38.296 72.096,-38.296 v1(72.2,-38.4)
  Bottom Layer w0.254: R4.2@49.7,-35.395 49.71,-35.405 49.71,-36.59 U2.34 50.62,-37.5 v1(54.096,-37.5) ; v1(72.2,-38.4) 73.9,-38.4 82.1,-46.6 U4.9
INA260_SDA: R5.2 U2.33 U4.8 | length 40
  Top Layer w0.254: U2.33 54.36,-38.7 70.778,-38.7 70.912,-38.834 71.134,-38.834 v1(71.2,-38.9)
  Bottom Layer w0.254: U2.33 52.28,-36.58 52.28,-35.415 R5.2@52.3,-35.395 ; v1(71.2,-38.9) 71.25,-38.9 79.75,-47.4 84.225,-51.875 U4.8
LCD_BACK: Q1.1 R3.2 U2.2 | length 9.5
  Top Layer w0.254: Q1.1 28.453,-51.573 29.722,-51.573 R3.2 29.895,-51.495 30.69,-50.7 35.88,-50.7 U2.2
LCD_D4: P2.10 R22.1 | length 14
  Top Layer w0.254: P2.10 35.912,-56.408 45.592,-56.408 47.105,-54.895 R22.1
LCD_D5: P2.11 R21.1 | length 14
  Top Layer w0.254: P2.11 33.776,-56.004 43.396,-56.004 44.505,-54.895 R21.1
LCD_D6: P2.12 R20.1 | length 14
  Top Layer w0.254: P2.12 31.64,-55.6 40.028,-55.6 40.738,-54.89 R20.1
LCD_D7: P2.13 R19.1 | length 13.9
  Top Layer w0.254: P2.13 29.805,-54.895 R19.1
LCD_E: P2.5 R23.1 | length 4.1
  Top Layer w0.254: P2.5 47.358,-57.662 47.358,-57.142 49.605,-54.895 R23.1
LCD_RS: P2.3 R6.1 | length 4.1
  Top Layer w0.254: P2.3 52.438,-57.662 52.438,-57.162 54.705,-54.895 R6.1
LCD_RW: P2.4 R24.1 | length 4.1
  Top Layer w0.254: P2.4 49.898,-57.662 49.898,-57.102 52.105,-54.895 R24.1
LED: J4.6 R16.1 | length 2.3
  Top Layer w0.254: J4.6 77.84,-55.36 77.84,-57.245 R16.1
MCLR: P1.6 R18.2 U2.1 | length 39.9
  Top Layer w0.254: P1.6 5.08,-46.9 29.9,-46.9 v1(32.3,-49.3) ; R18.2 31.373,-51.667 34.307,-51.667 U2.1
  Bottom Layer w0.254: v1(32.3,-49.3) 32.3,-49.66 U2.1
NetC16_1: C16.1 Q8.1 Q11.3 R10.2 R11.1 | length 39.6
  Top Layer w0.381: Q11.3 70.7,-17.755 70.825,-17.631 71.095,-17.631 72.52,-16.205 R10.2 92.1,-4.5 v1(94.1,-2.5)
  Bottom Layer w0.381: C16.1 92.77,-3.575 92.77,-2.325 R11.1 93.9,-2.3 v1(94.1,-2.5)
NetC39_1: C39.1 U6.4 U8.7 U8.8 | length 9.3
  Top Layer w0.254: U6.4 83.8,-30.349 83.949,-30.2 86.835,-30.2 86.91,-30.275 U8.8
  Top Layer w0.381: U6.4 83.813,-30.838 85.383,-30.838 C39.1 85.446,-30.855 86.191,-31.6 87.365,-31.6 88.265,-30.7 U8.7
NetD1_A: D1.A D2.C D5.A D6.C F1.2
NetD3_C: D3.C D4.A D7.C D8.A J1.1
NetD9_A: D9.A D10.C F2.2 | length 11.3
  Bottom Layer w0.762: D10.C 14.7,-23.14 14.7,-21.06 F2.2@14.7,-17.3
NetD14_C: D14.C R19.2 U2.3 | length 3.1
  Top Layer w0.254: R19.2 39.53,-53.275 39.53,-51.87 U2.3
  Bottom Layer w0.254: U2.3 39.56,-50.315 D14.C
NetD15_C: D15.C R20.2 U2.4 | length 3
  Top Layer w0.254: R20.2 U2.4
  Bottom Layer w0.254: U2.4 D15.C
NetD16_C: D16.C R21.2 U2.5 | length 3.1
  Top Layer w0.254: R21.2 44.62,-53.285 44.62,-51.86 U2.5
  Bottom Layer w0.254: U2.5 44.64,-50.335 D16.C
NetD17_C: D17.C R22.2 U2.6 | length 3
  Top Layer w0.254: U2.6 47.19,-51.85 47.19,-53.295 R22.2
  Bottom Layer w0.254: U2.6 47.18,-50.295 D17.C
NetD18_C: D18.C R23.2 U2.7 | length 3
  Top Layer w0.254: R23.2 49.71,-53.295 49.71,-51.85 U2.7
  Bottom Layer w0.254: D18.C 49.72,-50.295 U2.7
NetD19_C: D19.C R24.2 U2.8 | length 3.1
  Top Layer w0.254: R24.2 52.23,-53.275 52.23,-51.87 U2.8
  Bottom Layer w0.254: U2.8 52.26,-50.315 D19.C
NetD20_C: D20.C R6.2 U2.9 | length 3
  Top Layer w0.254: R6.2 U2.9
  Bottom Layer w0.254: U2.9 D20.C
NetF1_1: F1.1 J1.2
NetF2_1: F2.1 J2.2 | length 13.3
  Top Layer w1.016: J2.2 5.05,-31.69 6.49,-31.69 F2.1@14.7,-39.9
NetP2_14: P2.14 R2.1 | length 5.2
  Top Layer w0.254: P2.14 24.31,-57.85 24.31,-52.71 R2.1
NetP2_15: P2.15 R1.2 | length 5.3
  Top Layer w0.254: P2.15 21.793,-57.827 21.793,-52.612 R1.2@21.805,-52.6
NetP2_16: P2.16 Q1.3 | length 13.1
  Top Layer w0.254: P2.16 19.22,-57.86 19.22,-53 20.12,-52.1 21.279,-52.1 21.379,-52 24.855,-52 26.155,-50.7 Q1.3
NetQ2_B: Q2.B Q3.B Q4.B Q5.B Q6.B Q7.B Q8.2 | length 52.5
  Bottom Layer w0.381: Q8.2@95.85,-2.425 95.863,-2.438 98.088,-2.438 Q2.B 99.6,-3.95 99.6,-11 ; Q7.B 99.6,-43.9 99.6,-36.9 ; Q6.B 98.2,-36.9 99.6,-36.9 ; Q5.B 98.2,-28.3 99.6,-28.3 ; Q4.B 99.6,-19.6 ; Q3.B 99.6,-11 ; 99.6,-36.9 99.6,-28.3 ; 99.6,-28.3 99.6,-19.6 ; 99.6,-19.6 99.6,-11
NetQ9_D: Q9.3 U7.5 | length 8.3
  Bottom Layer w0.254: v1(76.875,-27.8) 76.897,-27.8 77.197,-27.5 80.8,-27.5 82.67,-29.37 v1(84.3,-29.37)
NetQ10_D: Q10.3 U5.5 | length 17.6
  Top Layer w0.254: Q10.3 78.945,-19.1 81.045,-17 92.6,-17 93.405,-17.805 U5.5
NetR7_2: R7.2 R9.2 U5.2 | length 4.8
  Top Layer w0.381: U5.2 90.883,-24.943 90.883,-26.487 R9.2 90.948,-26.552 94.058,-26.552 R7.2
NetR10_1: R10.1 U5.6 | length 1.7
  Top Layer w0.381: R10.1 92.117,-17.812 92.117,-19.457 U5.6
NetR16_2: R16.2 U2.19 | length 8.1
  Top Layer w0.254: R16.2 78.062,-58.995 78.3,-58.757 78.3,-58.695 80.2,-56.795 U2.19
NetU5_1: U5.1 VR1.3 | length 2.4
  Top Layer w0.381: VR1.3 88,-23.65 88.808,-24.458 89.494,-24.458 89.595,-24.559 U5.1
NetU5_8: U5.8 VR1.1 | length 2.4
  Top Layer w0.381: VR1.1 88.36,-20.29 88.78,-20.29 89.128,-19.942 89.494,-19.942 89.595,-19.841 U5.8
NetU6_5: U6.5 U7.2 | length 5.1
  Top Layer w0.254: U7.2 79.275,-26.83 80,-27.555 80,-29.8 79.773,-30.027 79.773,-30.734 79.682,-30.825 U6.5
NetU7_1: U7.1 VR2.3 | length 2.4
  Top Layer w0.254: U7.1 79.111,-25.56 79.271,-25.4 79.271,-24.879 80.15,-24 VR2.3
NetU7_8: U7.8 VR2.1 | length 2.3
  Top Layer w0.254: VR2.1 83.05,-24 83.929,-24.879 83.929,-25.4 84.089,-25.56 U7.8
OSC1: C13.1 U2.13 Y1.2 | length 7.4
  Bottom Layer w0.254: Y1.2 62.847,-48.3 63.693,-49.146 63.693,-50.573 U2.13 64.779,-52.021 64.779,-52.786 64.345,-53.22 C13.1
OSC2: C14.1 U2.14 Y1.1 | length 7.5
  Bottom Layer w0.254: C14.1 68.155,-52.495 U2.14 68.907,-50.433 68.907,-49.146 69.753,-48.3 Y1.1
OUT+: J3.2 Q2.E Q3.E Q4.E Q5.E Q6.E Q7.E R7.1 U4.12 | length 11.1
  Bottom Layer w0.254: U4.12 86.175,-47.735 J3.2
OUT-: J3.1 U4.1 U4.2 U4.3
OUT_CNTRL: R9.1 U6.3 U7.6 | length 12.2
  Top Layer w0.254: U6.3 83.762,-31.437 82.786,-31.437 82.4,-31.051 82.4,-29.575 83.875,-28.1 U7.6 84.302,-28.098 90.897,-28.098 R9.1
PGC: P1.2 U2.39 | length 28
  Top Layer w0.254: P1.2 12.94,-42.4 31.22,-42.4 U2.39
PGD: P1.3 U2.40 | length 28
  Top Layer w0.254: P1.3 10.9,-41.9 29.18,-41.9 U2.40
PGM: P1.1 U2.38 | length 28
  Top Layer w0.254: P1.1 14.88,-43 33.16,-43 U2.38
SHDN1: Q10.1 R15.1 U2.29 | length 29.9
  Top Layer w0.254: U2.29 64.2,-34.82 v1(64.2,-31.3) ; v1(64.2,-23.3) 71.5,-23.3 74.2,-20.6 74.2,-18.5 74.395,-18.305 R15.1 75.378,-18.227 76.648,-18.227 Q10.1
  Bottom Layer w0.254: v1(64.2,-31.3) v1(64.2,-23.3)
SHDN2: Q9.1 R14.1 U2.28 | length 16.7
  Top Layer w0.254: U2.28 68.76,-32.8 72.2,-32.8 v1(73.6,-31.4) ; R14.1 73.578,-26.927 74.848,-26.927 Q9.1
  Bottom Layer w0.254: v1(73.5,-27) 73.6,-27.1 v1(73.6,-31.4)
SHDN3: Q11.1 R17.2 U2.30 | length 24.5
  Top Layer w0.254: U2.30 63.1,-33.38 v1(63.1,-30.7) ; v1(63.3,-22.6) 65.925,-19.975 Q11.1 69.828,-20.052 69.828,-21.422 R17.2
  Bottom Layer w0.254: v1(63.1,-30.7) 63.1,-22.8 v1(63.3,-22.6)
SHDN4: U2.21 U8.3 | length 7.6
  Top Layer w0.508: v1(85.7,-36.9) 88.76,-36.9 89.535,-36.125 U8.3
  Bottom Layer w0.508: U2.21 85.4,-36.6 v1(85.7,-36.9)
USB_D+: J5.3 U2.24 | length 57.6
  Top Layer w0.254: J5.3 23.2,-43.6 68.12,-43.6 U2.24
USB_D-: J5.2 U2.23 | length 57.6
  Top Layer w0.254: J5.2 25.24,-44.1 70.16,-44.1 U2.23
Vcc: C11.1 C18.P C19.1 C26.1 C27.1 C28.1 C29.1 C30.1 C31.1 D9.C D21.C U1.1 U7.7 VR2.2 | length 103.2
  Top Layer w0.254: 77.5,-26 77.7,-26.2 83.245,-26.2 ; VR2.2 81.6,-24.555 83.245,-26.2 ; U7.7@84.088,-26.83 83.875,-26.83 83.245,-26.2
  Top Layer w0.381: VR2.2@80.84,-20.7 VR2.2@81.2,-21.06
  Top Layer w0.508: v1(24.055,-37.435) 28.286,-33.204 28.286,-30.214 32.642,-25.858 v1(40.898,-25.858) 42.355,-24.4 75.9,-24.4 77.055,-25.555 77.5,-26
  Bottom Layer w0.508: U1.1 23.828,-38.972 23.828,-37.662 v1(24.055,-37.435) C11.1
  Bottom Layer w0.762: D9.C 18.65,-21.95 C18.P 33.15,-22 33.15,-25.81 C26.1 33.202,-25.858 v1(40.898,-25.858) C31.1
Vee: C17.P C20.1 C32.2 C33.2 C34.2 C35.2 C36.2 C37.2 D10.A D22.A U7.4 | length 70.2
  Top Layer w0.762: v1(58.2,-27.345) D22.A@61.315,-27.345 ; D22.A@61.315,-27.315 61.415,-27.315 61.619,-27.519 61.619,-27.619 64.4,-30.4 76.5,-30.4 76.64,-30.26 77.53,-29.37 U7.4
  Bottom Layer w0.762: D10.A@13.66,-32.405 15.74,-32.405 46.3,-32.405 47.445,-32.405 C17.P C32.2 50.565,-27.54 50.76,-27.345 52.2,-27.345 54,-27.345 C35.2 C36.2 v1(58.2,-27.345)
Vraw: C1.P C2.P C3.P C4.P C5.1 C6.1 C7.1 C8.1 C9.1 C10.1 C21.1 C45.1 C46.1 C47.1 C48.1 C49.1 C50.1 C51.1 C52.1 D1.C D4.C D5.C D8.C Q2.C Q3.C Q4.C Q5.C Q6.C Q7.C Q8.3 U5.7 VR1.2 | length 13
  Top Layer w0.381: VR1.2 84.7,-22.16 85.06,-21.8 88.9,-21.8 90.691,-20.01 90.696,-20.01 90.865,-19.841 v1(90.865,-19.475)
  Bottom Layer w0.381: 90.8,-14 90.865,-14.065 v1(90.865,-19.475)
VUSB: J5.1 U2.18 | length 54.8
  Top Layer w0.254: J5.1 27.28,-44.6 70.42,-44.6 U2.18
pads on no net: U2.10 U2.22 U2.35 U2.36 U2.37 U4.13

## Polygon pours and split planes (outlines as drawn)
GND on Bottom Layer "Top Layer-No Net1" (solid, pour order 10): 0,-60 0,0 100,0 100,-60
OUT- on Bottom Layer "NONET_L01_P-001" (solid, pour order 8): 87.2,-51.6 87.2,-55.7 89.1,-55.7 89.1,-51.6
NetD1_A on Bottom Layer "NONET_L01_P-001" (solid, pour order 5): 39.8,-5.7 39.8,-0.9 22.9,-0.9 22.4,-1.4 22.4,-5.3 22.8,-5.7 31.2,-5.7 31.2,-5.1 32.6,-3.7 33.4,-3.7 34.5,-4.8 34.5,-5.7
Vraw on Bottom Layer "NONET_L01_P-001" (solid, pour order 4): 21.9,-3.6 11.5,-3.6 11.5,-8.8 12.2,-9.5 12.2,-14 12.3,-14.1 86.9,-14.1 95.4,-22.6 95.4,-47.1 96.876,-48.576 99.2,-48.598 99.2,-3.8 93.8,-3.8 89.1,-8.5 25.5,-8.5 21.9,-4.9
NetD1_A on Bottom Layer "NONET_L01_P-001" (solid, pour order 2): 24.8,-5.7 22.8,-5.7 22.8,-4.2 21.7,-3.1 12.1,-3.1 12.1,-1.4 22.4,-1.4 24.8,-3.8
NetD3_C on Bottom Layer "NONET_L01_P-001" (solid, pour order 1): 6.3,-16.3 6.3,-18.6 4,-18.6 4,-15.5 5.9,-13.6 5.9,-8.5 5.8,-8.4 5.9,-8.3 5.9,-3.6 10.8,-3.6 10.9,-3.7 10.9,-8.6 12.006,-9.706 11.999,-14.1 22.501,-14.1 22.494,-16.189 10.759,-16.215 10.761,-15.5 7.1,-15.5
NetF1_1 on Bottom Layer "NONET_L01_P-001" (solid, pour order 0): 5.8,-11.7 5.8,-13.5 4.2,-13.5 0.2,-9.5 0.2,-3.7 3.2,-3.7 3.2,-9.1
GND on Top Layer "Top Layer-No Net" (solid, pour order 9): 0,-60 0,0 100,0 100,-60
OUT+ on Top Layer "NONET_L01_P-001" (solid, pour order 6): 99.8,-6 99.8,-56.2 95.7,-56.2 92.163,-56.2 92.163,-40.837 95.7,-37.3 95.7,-7.5 97.2,-6

## Silkscreen, mask and mechanical layers (free items; w line width, h text height)
Top Overlay:
  text "GND" at 17.503,-48.297 h0.76
  text "D+" at 20.603,-48.297 h0.76
  text "D-" at 23.203,-48.297 h0.76
  text "Vusb" at 25.403,-48.297 h0.76
  text "BB-2020-04-20_V1" at 2.403,-54.17 h0.76
  text "-" at 83.854,-55.808 h1.52
  text "+" at 97.554,-55.8 h1.52
Mechanical 1:
  the board outline again, w0.15